# Allegro board s08-2.brd
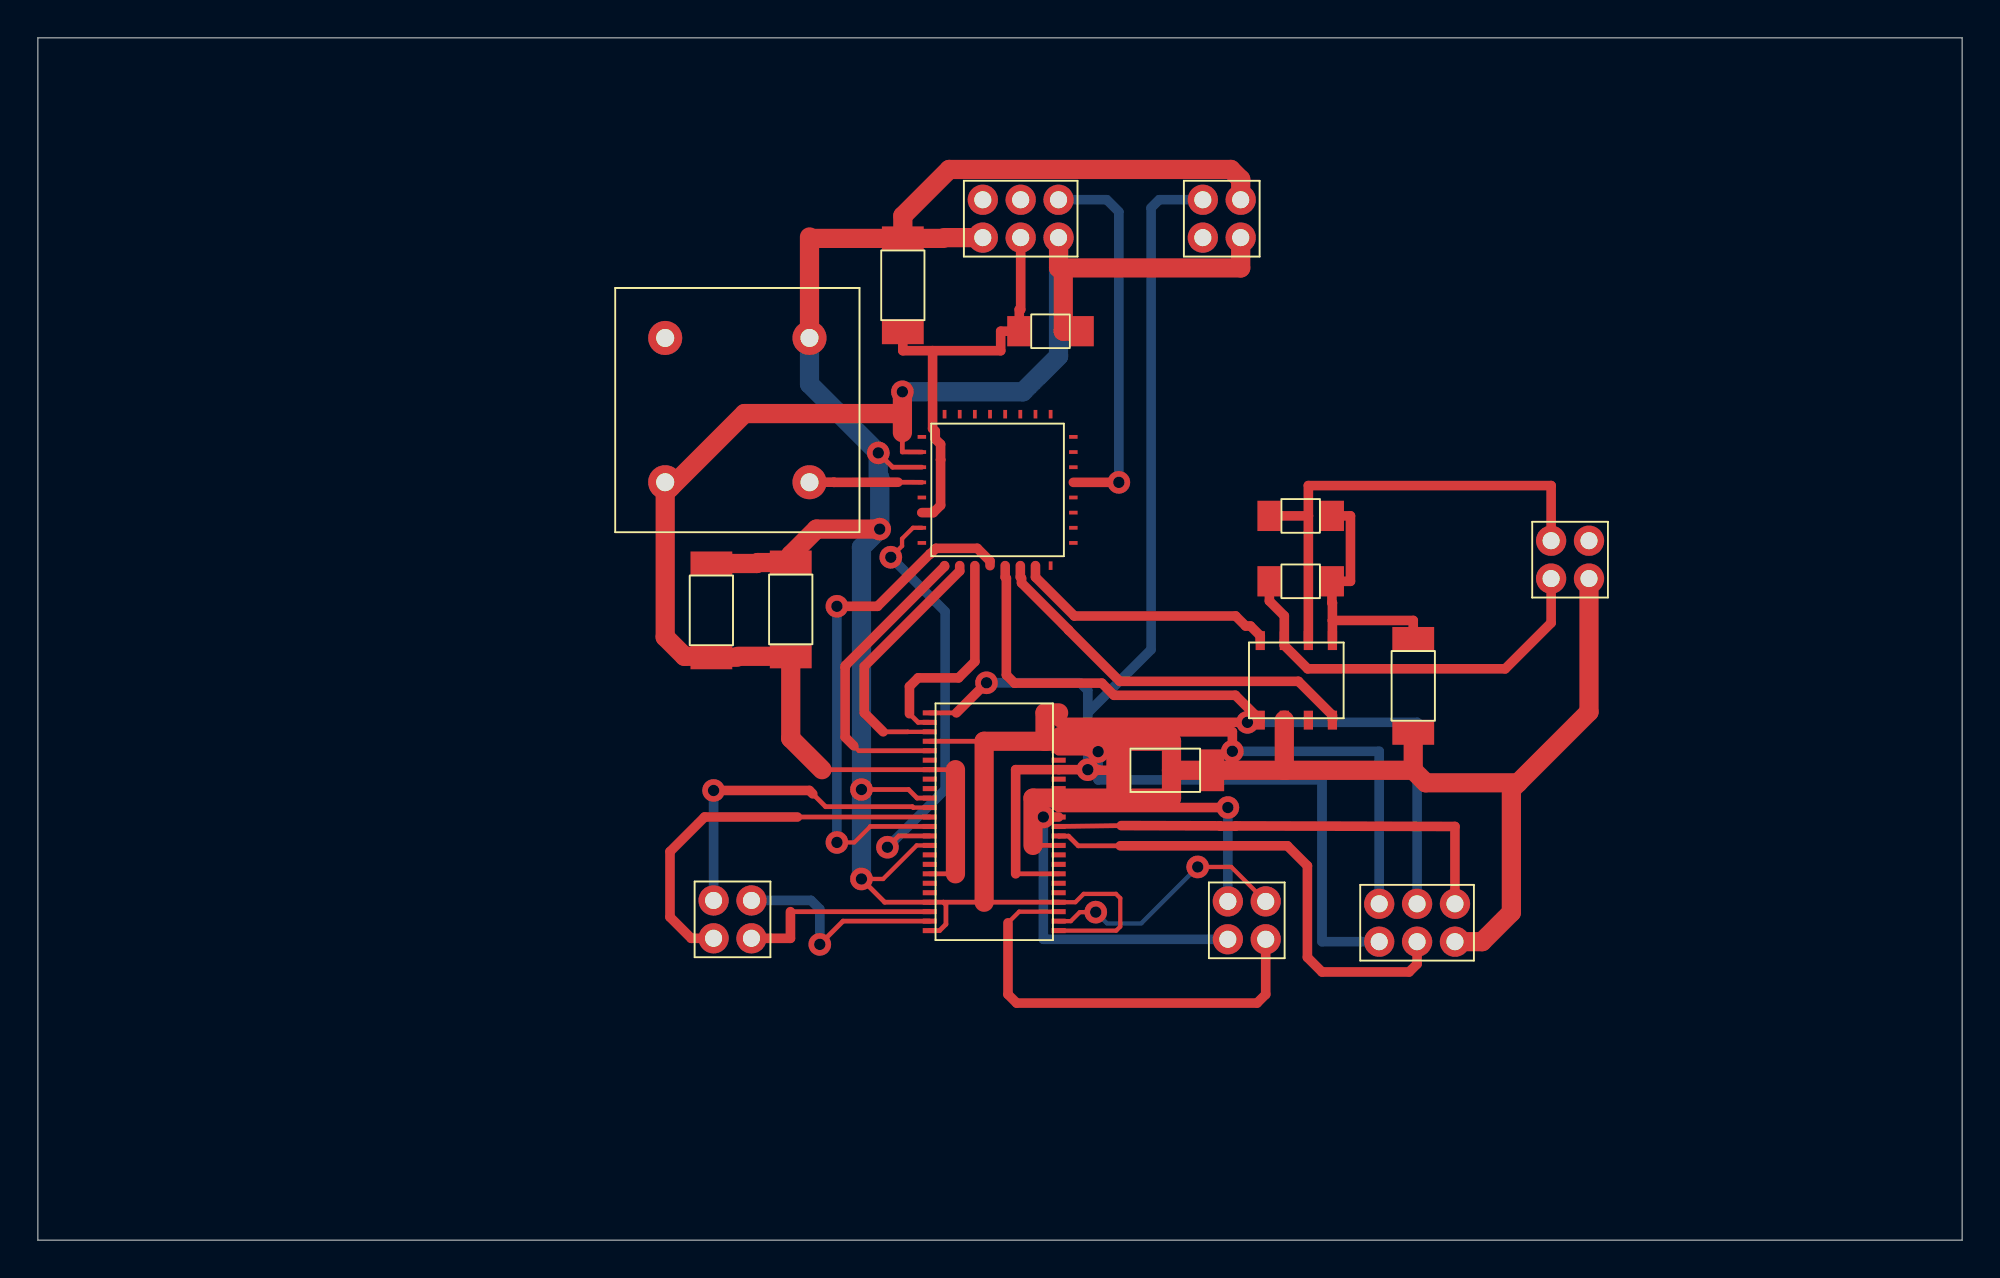
[diagram p0: board, top side]
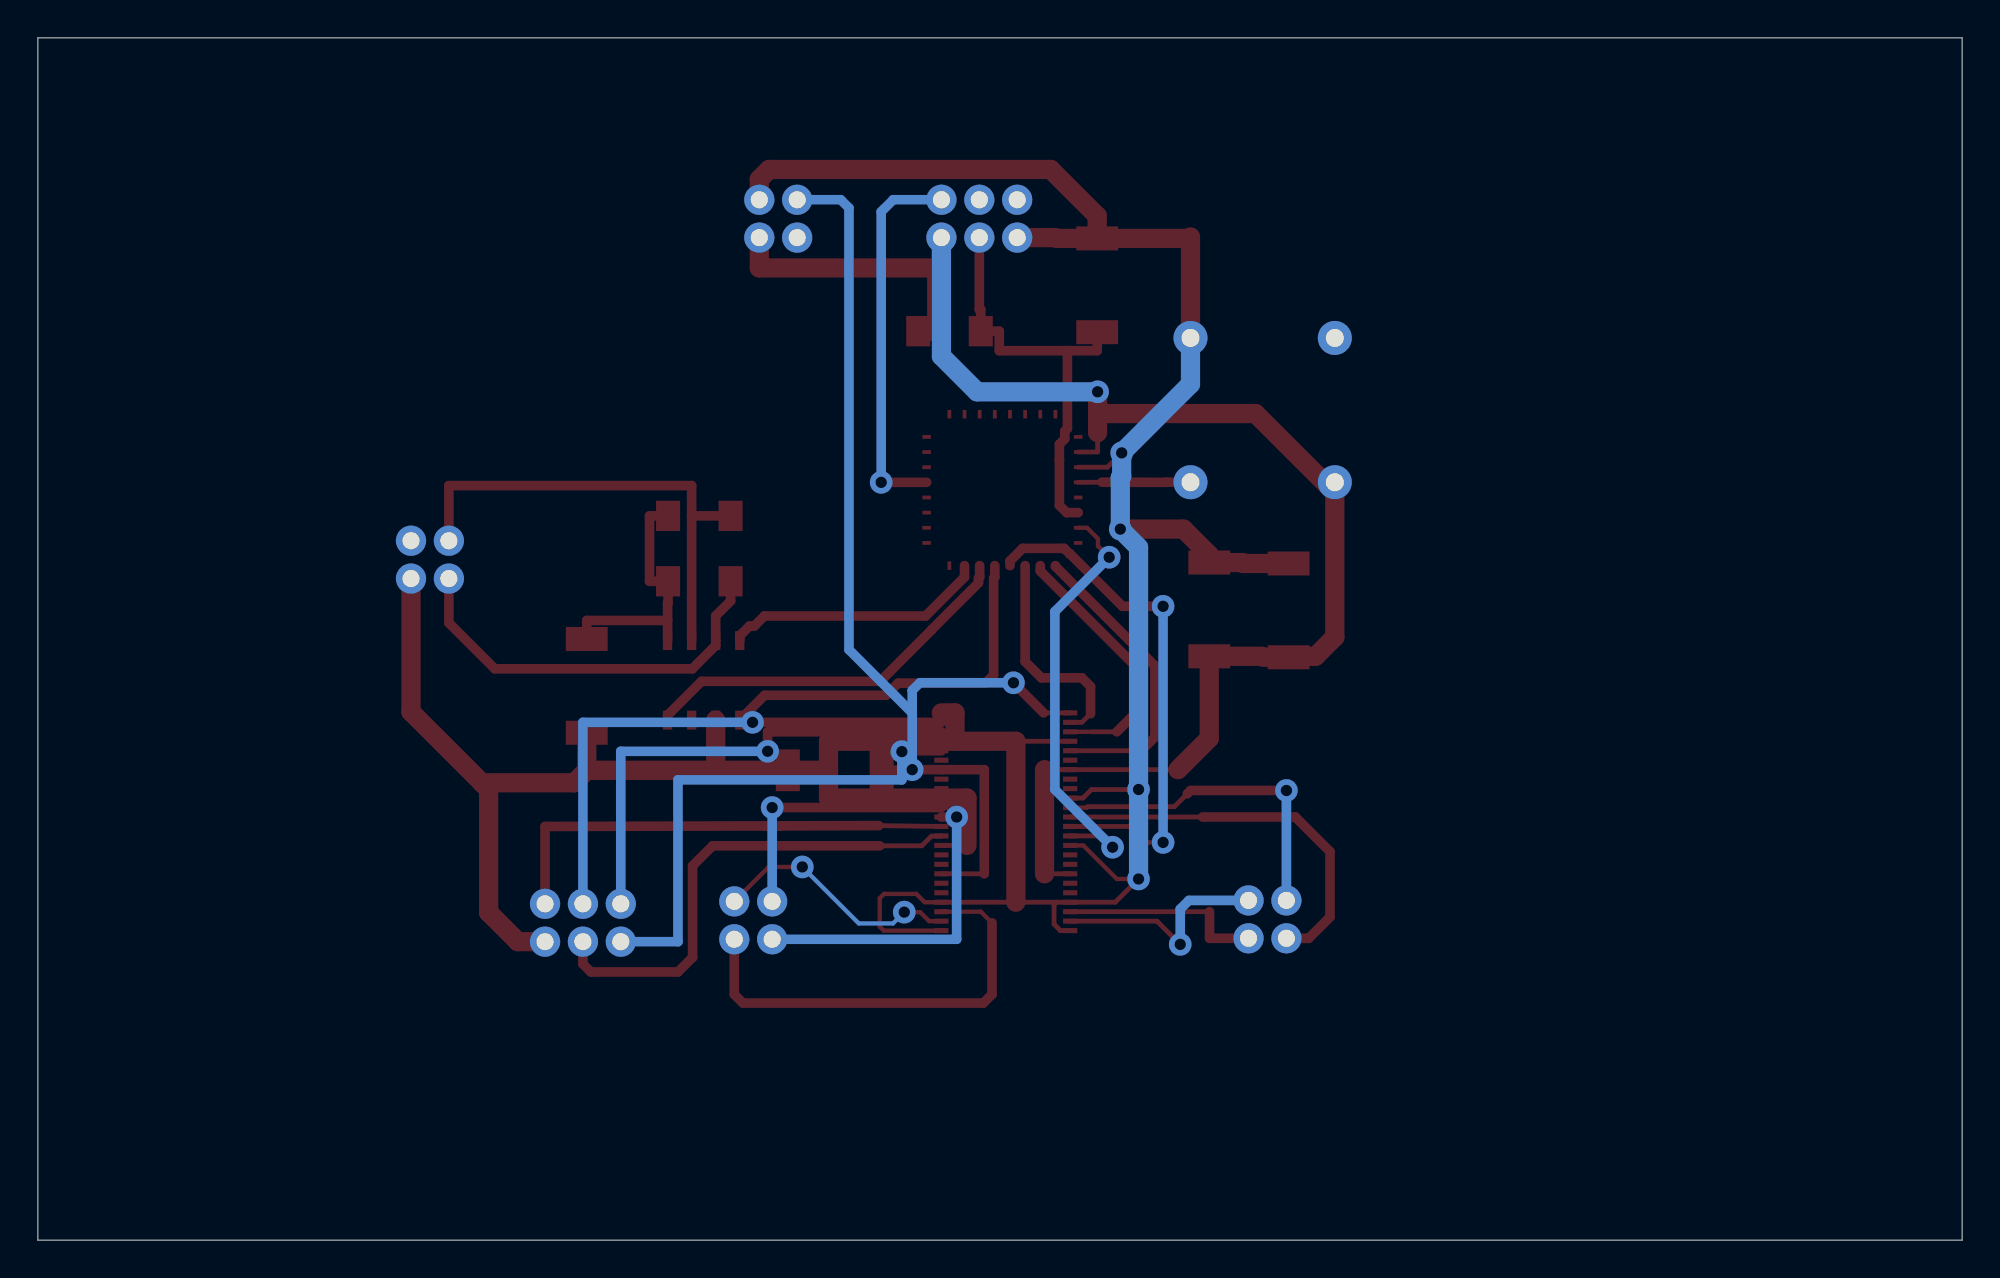
[diagram p1: board, bottom side, seen from below]

Outline 101.6 x 63.5 mm; copper layers: TOP, BOTTOM. Coordinates in mm from the lower left corner of the outline.
Outline path: 0,63.5 101.6,63.5 101.6,0 0,0 0,63.5

## Placement (name value [footprint] x y rotation side)
C9  0.1u  [SMDCAP]  39.75 33.38 90 top
C10  0.1u  [SMDCAP]  59.59 24.82 0 top
C11  0.1u  [SMDCAP]  72.62 29.34 90 top
C12  0.1u  [SMDCAP]  45.67 50.37 270 top
C13  10u  [SMDCAP]  35.56 33.32 90 top
J7  Background Header  [HEADER6]  51.89 53.95 270 top
J12  CON6  [HEADER6]  72.82 16.76 270 top
J14  CON4  [HEADER4]  62.51 53.95 0 top
J15  CON4  [HEADER4]  80.9 35.94 0 top
J16  CON4  [HEADER4]  63.83 16.89 0 top
J17  CON4  [HEADER4]  36.68 16.94 0 top
R3  60  [SMDRES]  66.67 34.8 180 top
R4  60  [SMDRES]  66.67 38.25 0 top
R5  10k  [SMDRES]  53.47 48.01 0 top
U1  MC9S08DZ60  [MC9S08_LQFP32]  50.67 39.62 0 top
U2  SN74LVC16T245  [SN74_DGG]  50.5 22.1 0 top
U3  TJA1040T  [TJA1040_SO8]  66.45 29.57 90 top
U4  -  [OSCILLATOR]  36.93 43.84 0 top

## Library data of the parts
C9 C10 C13 = C_elect_0: Tolerance: ***; User Part Number: ***
C11 C12 = C: Tolerance: ***; User Part Number: ***
J7 = CONN MOD 6-6_J
J12 = CON6
J14-J17 = CON4
R3-R5 = R: Tolerance: ***; User Part Number: ***
U1 = MC9S08DZ60
U2 = SN74LVC16T245
U3 = TJA1040T
U4 = OSCILLATOR_0

## Footprints (pads in the part's own frame, mm; a bottom-side part is the same pattern mirrored in y, then rotated)
HEADER4
  round 1.6 hole 0.9: 1(-1,1) 2(-1,-1) 3(1,-1) 4(1,1)
HEADER6
  round 1.6 hole 0.9: 1(-1,2) 2(-1,0) 3(-1,-2) 4(1,-2) 5(1,0) 6(1,2)
MC9S08_LQFP32
  rect 0.45x0.2 smd: 1(-4,2.8) 2(-4,2) 3(-4,1.2) 4(-4,0.4) 5(-4,-0.4) 6(-4,-1.2) 7(-4,-2) 8(-4,-2.8) 17(4,-2.8) 18(4,-2) 19(4,-1.2) 20(4,-0.4) 21(4,0.4) 22(4,1.2) 23(4,2) 24(4,2.8)
  rect 0.2x0.45 smd: 9(-2.8,-4) 10(-2,-4) 11(-1.2,-4) 12(-0.4,-4) 13(0.4,-4) 14(1.2,-4) 15(2,-4) 16(2.8,-4) 25(2.8,4) 26(2,4) 27(1.2,4) 28(0.4,4) 29(-0.4,4) 30(-1.2,4) 31(-2,4) 32(-2.8,4)
OSCILLATOR
  round 1.8 hole 0.95 unplated: (-3.81,3.81) (-3.81,-3.81) (3.81,3.81) (3.81,-3.81)
SMDCAP
  rect 1.27x2.21 smd: 1(-2.54,0) 2(2.413,0)
SMDRES
  rect 1.27x1.6 smd: 1(-1.651,0) 2(1.651,0)
SN74_DGG
  rect 0.75x0.27 smd: 1(-3.4,5.75) 2(-3.4,5.25) 3(-3.4,4.75) 4(-3.4,4.25) 5(-3.4,3.75) 6(-3.4,3.25) 7(-3.4,2.75) 8(-3.4,2.25) 9(-3.4,1.75) 10(-3.4,1.25) 11(-3.4,0.75) 12(-3.4,0.25) 13(-3.4,-0.25) 14(-3.4,-0.75) 15(-3.4,-1.25) 16(-3.4,-1.75) 17(-3.4,-2.25) 18(-3.4,-2.75) 19(-3.4,-3.25) 20(-3.4,-3.75) 21(-3.4,-4.25) 22(-3.4,-4.75) 23(-3.4,-5.25) 24(-3.4,-5.75) 25(3.4,-5.75) 26(3.4,-5.25) 27(3.4,-4.75) 28(3.4,-4.25) 29(3.4,-3.75) 30(3.4,-3.25) 31(3.4,-2.75) 32(3.4,-2.25) 33(3.4,-1.75) 34(3.4,-1.25) 35(3.4,-0.75) 36(3.4,-0.25) 37(3.4,0.25) 38(3.4,0.75) 39(3.4,1.25) 40(3.4,1.75) 41(3.4,2.25) 42(3.4,2.75) 43(3.4,3.25) 44(3.4,3.75) 45(3.4,4.25) 46(3.4,4.75) 47(3.4,5.25) 48(3.4,5.75)
TJA1040_SO8
  rect 1x0.49 smd: 1(-2.1,1.905) 2(-2.1,0.635) 3(-2.1,-0.635) 4(-2.1,-1.905) 5(2.1,-1.905) 6(2.1,-0.635) 7(2.1,0.635) 8(2.1,1.905)

## Nets
GND: C9.2(-) C10.2(-) C11.1 C12.1 C13.2(-) J7.4(2) J12.6 J14.4 J15.3 U1.3(VSS) U2.4(GND#4) U2.10(GND#10) U2.15(GND#15) U2.21(GND#21) U2.24(2DIR) U2.25(2OEN) U2.28(GND#28) U2.34(GND#34) U2.39(GND#39) U2.45(GND#45) U2.48(1OEN) U3.2(GND)
VCC_1.8: C10.1(+) J14.1 U2.1(1DIR) U2.31(VCCA#31) U2.42(VCCA#42)
VCC_5.0: C9.1(+) C13.1(+) J7.6 J14.3 R5.2 U1.2(VDD) U2.7(VCCB#7) U2.18(VCCB#18)
VDD_S08: U3.3(VCC)
1A4: U2.43(1A4)
1A5: U2.41(1A5)
1A6: U2.40(1A6)
1A7: J16.1 U2.38(1A7)
1A8: J16.2 U2.37(1A8)
1B4: U2.6(1B4)
1B5: U2.8(1B5)
1B6: U2.9(1B6)
1B7: J17.1 U2.11(1B7)
1B8: J17.2 U2.12(1B8)
2A3: U2.33(2A3)
2A4: U2.32(2A4)
2A5: U2.30(2A5)
2A6: U2.29(2A6)
2A7: J16.3 U2.27(2A7)
2A8: J16.4 U2.26(2A8)
2B3: U2.16(2B3)
2B4: U2.17(2B4)
2B5: U2.19(2B5)
2B6: U2.20(2B6)
2B7: J17.3 U2.22(2B7)
2B8: J17.4 U2.23(2B8)
BKGD: J7.1 U1.21(BKGD/MS)
CANH: J15.2 R3.2 U3.7(CANH)
CANL: J15.1 R4.1 U3.6(CANL)
EXTAL: U1.4(PTG0/EXTAL)
RESET: C12.2 J7.5(4) R5.1 U1.6(RESETN)
RXCAN: U1.14(PTE7/RXD2/RXCAN) U3.4(RXD)
SPI_CLOCK_1.8V: J12.3 U2.46(1A2)
SPI_CLOCK_5V: U1.10(PTE3/SPSCK) U2.3(1B2)
SPI_CS_1.8V: J12.4 U2.44(1A3)
SPI_CS_5V: U1.9(PTE2/SSN) U2.5(1B3)
SPI_INTERRUPT_1.8V: J12.5 U2.35(2A2)
SPI_INTERRUPT_5V: U1.7(PTE0/TXD1) U2.14(2B2)
SPI_MISO_1.8V: J12.1 U2.36(2A1)
SPI_MISO_5V: U1.12(PTE5/SDA/MISO) U2.13(2B1)
SPI_MOSI_1.8V: J12.2 U2.47(1A1)
SPI_MOSI_5V: U1.11(PTE4/SCL/MOSI) U2.2(1B1)
STB: U1.15(PTD0/PID0/TPM2CH0) U3.8(STB)
TXCAN: U1.13(PTE6/TXD2/TXCAN) U3.1(TXD)
N57563: C11.2 R3.1 R4.2 U3.5(SPLIT)

Pads without a net: J7 2 3; J14 2; J15 4; U1 1 5 8 16 17 18 19 20 22 23 24 25 26 27 28 29 30 31 32

## Via types
v1: diameter 1.2, hole 0.6, TOP to BOTTOM, 21 vias

## Routing (per net, layer and track width the routed paths; a pad name or vN(x,y) marks a point on that pad's centre or on a via; arc(x,y) is an arc through that point)
GND: length 192.3
  TOP w0.229: v1(43.48,19.08) 44.63,19.08 46.4,20.85 U2.15 ; 40.82,52.91 40.74,52.98 ; U2.25 56.94,16.35 57.15,16.56 57.15,18.06 56.92,18.29 55.22,18.29 54.78,17.85 U2.28 ; 47.81,52.91 47.85,52.95
  TOP w0.254: U2.24 47.61,16.35 47.94,16.68 47.94,17.72 47.81,17.85 ; v1(44.37,41.58) 45.13,40.82 U1.3 ; v1(43.48,23.8) 45.97,23.8 46.42,23.35 U2.10 ; 49.96,26.35 U2.4 ; 47.81,17.85 U2.28 ; 47.81,17.85 U2.21 44.71,17.85 v1(43.48,19.08) ; U2.34 52.54,20.85
  TOP w1.016: 65.81,24.82 C10.2 59.86,24.82 ; 65.81,24.82 U3.2 ; 65.81,24.82 72.62,24.82 ; 53.18,26.35 53.18,27.85 U2.48 ; 53.18,26.35 49.96,26.35 49.96,17.85 ; 53.18,26.35 U2.45 59.86,26.35 59.86,24.82 ; 59.86,24.82 59.86,23.35 U2.39 52.54,23.35 52.54,20.85 ; C12.1 47.81,52.91 ; C12.1 45.67,54.1 48.12,56.55 62.99,56.55 63.51,56.03 J14.4 ; C12.1 40.82,52.91 ; 47.85,52.95 J7.4 ; 78.16,24.16 77.8,23.8 77.8,17.31 76.26,15.76 J12.6 ; 78.16,24.16 73.28,24.16 72.62,24.82 ; 78.16,24.16 81.9,27.9 J15.3 ; C11.1 72.62,24.82 ; v1(44.45,37.55) 41.11,37.55 39.75,36.2 C9.2 38.01,35.79 37.96,35.74 C13.2 ; 40.74,52.98 40.74,47.65
  BOTTOM w1.016: 40.74,47.65 40.74,45.21 v1(44.37,41.58) 44.37,40.34 44.45,40.27 v1(44.45,37.55) 43.48,36.59 v1(43.48,23.8) v1(43.48,19.08)
VCC_1.8: length 57.5
  TOP w0.254: U2.31 51.63,19.35 ; U2.1 48.5,27.85
  TOP w0.508: C10.1 55.98,24.82 55.98,24.85 v1(55.44,24.85) U2.42 51.63,24.85 51.63,19.35 ; 48.5,27.85 v1(50.09,29.44)
  BOTTOM w0.508: J14.1 59.21,54.95 58.78,54.52 58.78,31.19 55.44,27.85 ; v1(50.09,29.44) 55.03,29.44 55.44,29.03 55.44,27.85 ; 55.44,27.85 v1(55.44,24.85)
VCC_5.0: length 86.8
  TOP w0.229: 36.91,30.78 36.96,30.84
  TOP w0.254: 48.45,24.85 U2.7 41.4,24.85 ; U1.2 45.64,41.63 45.65,42.65 ; 48.45,19.35 U2.18
  TOP w1.016: 45.65,43.57 v1(45.65,44.81) ; 45.65,43.57 45.65,42.65 ; 45.65,43.57 45.56,43.66 37.31,43.66 33.12,39.47 ; R5.2 54.14,48.01 54.14,51.35 ; 54.14,51.35 63.51,51.35 J14.3 ; 54.14,51.35 53.89,51.35 J7.6 ; 33.12,39.47 33.12,40.03 ; 33.12,39.47 33.12,31.85 34.14,30.84 35.51,30.84 C13.1 36.91,30.78 ; 41.4,24.85 39.75,26.5 C9.1 36.96,30.84 ; 48.45,24.85 48.45,19.35
  BOTTOM w1.016: J7.6 53.89,46.69 52.01,44.81 v1(45.65,44.81)
1A7: length 13.9
  TOP w0.508: U2.38 v1(62.83,22.85)
  BOTTOM w0.508: J16.1 v1(62.83,22.85)
1A8: length 17
  TOP w0.508: U2.37 v1(53.09,22.35)
  BOTTOM w0.508: v1(53.09,22.35) 53.09,15.89 J16.2
1B7: length 17.6
  TOP w0.229: 46.22,22.85 U2.11
  TOP w0.254: 46.22,22.85 46.17,22.89 41.59,22.89 40.91,23.57
  TOP w0.508: 40.91,23.57 40.74,23.75 v1(35.68,23.75)
  BOTTOM w0.508: J17.1 v1(35.68,23.75)
1B8: length 20.7
  TOP w0.254: 40.1,22.35 U2.12
  TOP w0.508: J17.2 34.5,15.94 33.38,17.06 33.38,20.52 35.2,22.35 40.1,22.35
2A7: length 23.6
  TOP w0.229: 51.22,16.76 51.81,17.35 U2.27
  TOP w0.508: 51.22,16.76 51.22,12.98 51.68,12.52 64.37,12.52 64.83,12.98 J16.3
2A8: length 13.4
  TOP w0.229: v1(61.24,19.71) 63.01,19.71 J16.4 ; U2.26 54.54,16.85 55.01,17.32 v1(55.85,17.32)
  BOTTOM w0.229: v1(55.85,17.32) 56.45,16.73 58.26,16.73 v1(61.24,19.71)
2B7: length 10.8
  TOP w0.254: U2.22 39.73,17.35
  TOP w0.508: J17.3 39.73,15.94 39.73,17.35
2B8: length 12
  TOP w0.254: U2.23 42.51,16.85 v1(41.28,15.62)
  BOTTOM w0.508: v1(41.28,15.62) 41.28,17.48 40.83,17.94 J17.4
BKGD: length 20.1
  TOP w0.508: U1.21 v1(57.07,40.02)
  BOTTOM w0.508: v1(57.07,40.02) 57.07,54.31 56.44,54.95 J7.1
CANH: length 21.7
  TOP w0.508: R3.2 65.02,33.76 65.81,32.97 U3.7 65.81,31.41 67.05,30.18 77.47,30.18 79.9,32.6 J15.2
CANL: length 26
  TOP w0.508: J15.1 79.9,39.85 67.08,39.85 67.08,38.25 ; 67.08,38.25 U3.6 ; 67.08,38.25 R4.1
EXTAL: length 5.9
  TOP w0.254: U1.4 45.42,40.03
  TOP w0.508: 45.42,40.03 42.03,40.02 42.02,40.03 40.74,40.03
RESET: length 22.7
  TOP w0.508: 47.24,46.98 47.24,42.86 47.38,42.72 47.38,42.32 47.66,42.03 47.66,41.21 47.66,38.81 47.28,38.42 U1.6 ; 47.24,46.98 45.67,46.98 C12.2 ; 47.24,46.98 50.84,46.98 50.84,48.01 R5.1 51.82,49.15 51.89,49.15 J7.5
RXCAN: length 20.5
  TOP w0.508: U1.14 51.87,35.02 51.94,34.95 51.94,34.71 54.42,32.23 54.42,32.22 57.12,29.51 66.56,29.51 68.35,27.72 U3.4
SPI_CLOCK_1.8V: length 26
  TOP w0.508: v1(63.07,25.82) 63.07,26.85 U2.46
  BOTTOM w0.508: v1(63.07,25.82) 70.82,25.82 J12.3
SPI_CLOCK_5V: length 13.7
  TOP w0.229: U2.3 45.92,26.85
  TOP w0.254: 45.92,26.85 44.63,26.85
  TOP w0.508: U1.10 48.67,35.34 43.64,30.31 43.64,27.84 44.63,26.85
SPI_CS_1.8V: length 27
  TOP w0.508: v1(55.98,25.8) 55.44,25.8 55.44,25.85 U2.44
  BOTTOM w0.508: J12.4 67.8,15.76 67.8,24.31 55.98,24.31 v1(55.98,25.8)
SPI_CS_5V: length 16
  TOP w0.229: 43.34,25.85 43.08,26.11
  TOP w0.254: U2.5 43.34,25.85
  TOP w0.508: 43.08,26.11 42.62,26.57 42.62,30.25 42.64,30.26 42.64,30.35 47.87,35.58 U1.9
SPI_INTERRUPT_1.8V: length 26.1
  TOP w0.254: 57.15,20.83 54.93,20.83 54.42,21.34 53.9,21.34 U2.35
  TOP w0.508: J12.5 72.82,14.58 72.4,14.16 67.8,14.16 67.03,14.94 67.03,19.77 65.97,20.83 57.15,20.83
SPI_INTERRUPT_5V: length 22.8
  TOP w0.229: v1(45.03,36.07) 45.63,36.66 45.63,37.05 46.21,37.62 U1.7
  TOP w0.254: v1(44.86,20.75) 45.45,21.35 U2.14
  BOTTOM w0.508: v1(45.03,36.07) 47.9,33.2 47.9,23.8 v1(44.86,20.75)
SPI_MISO_1.8V: length 25
  TOP w0.254: U2.36 57.2,21.89
  TOP w0.508: 57.2,21.89 62.41,21.88 62.42,21.87 63.24,21.87 63.25,21.88 74.82,21.85 J12.1
SPI_MISO_5V: length 27.6
  TOP w0.229: v1(42.19,21.01) 43.11,21.01 43.95,21.85
  TOP w0.254: U2.13 43.95,21.85
  TOP w0.508: v1(42.19,33.48) 44.33,33.48 47.1,36.25 47.12,36.25 47.41,36.54 49.6,36.54 50.27,35.87 U1.12
  BOTTOM w0.508: v1(42.19,21.01) v1(42.19,33.48)
SPI_MOSI_1.8V: length 28.5
  TOP w0.508: U2.47 v1(63.86,27.35)
  BOTTOM w0.508: v1(63.86,27.35) 72.82,27.35 J12.2
SPI_MOSI_5V: length 11.8
  TOP w0.254: 46.02,27.81 46.48,27.35 U2.2
  TOP w0.508: U1.11 49.47,30.56 48.61,29.7 46.48,29.7 46.02,29.24 46.02,27.81
STB: length 14
  TOP w0.508: U3.8 64.54,31.92 64.03,32.44 63.77,32.44 63.24,32.97 54.73,32.97 52.67,35.02 U1.15
TXCAN: length 20.2
  TOP w0.508: U1.13 51.07,35.02 51.14,34.95 51.14,29.85 51.57,29.42 56.18,29.42 56.82,28.78 63.23,28.78 U3.1
N57563: length 13.8
  TOP w0.508: C11.2 72.62,32.73 68.35,32.73 ; R4.2 69.3,38.25 69.3,34.8 R3.1 68.33,33.66 68.35,33.66 68.35,32.73 ; 68.35,32.73 U3.5
